# Altium PCB circuit.PcbDoc
Units mil, origin at the board's own origin, x right, y up, seen from the top; angles counter-clockwise.
Board outline 5474.5 x 3359.91 mil, 2 copper layers (Top Layer, Top, Bottom Layer, Bottom); 18 components, 16 nets, 65 pads, 1 vias.
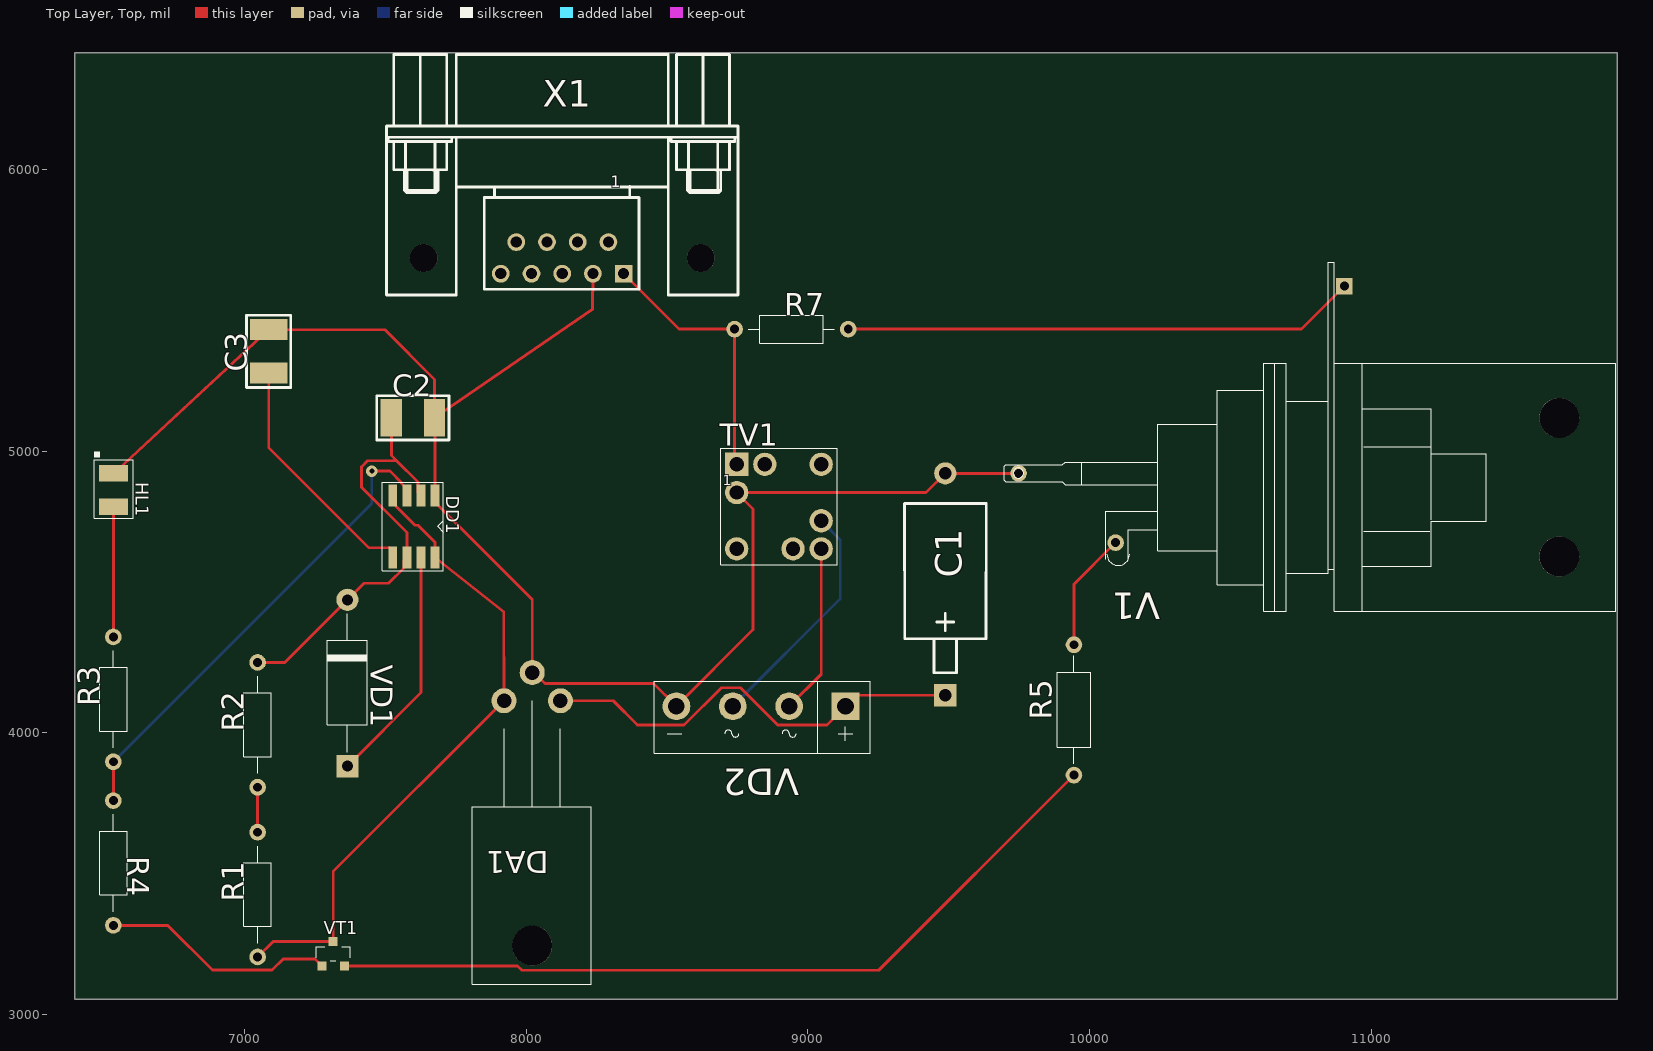
[diagram p0: Top Layer, Top view]
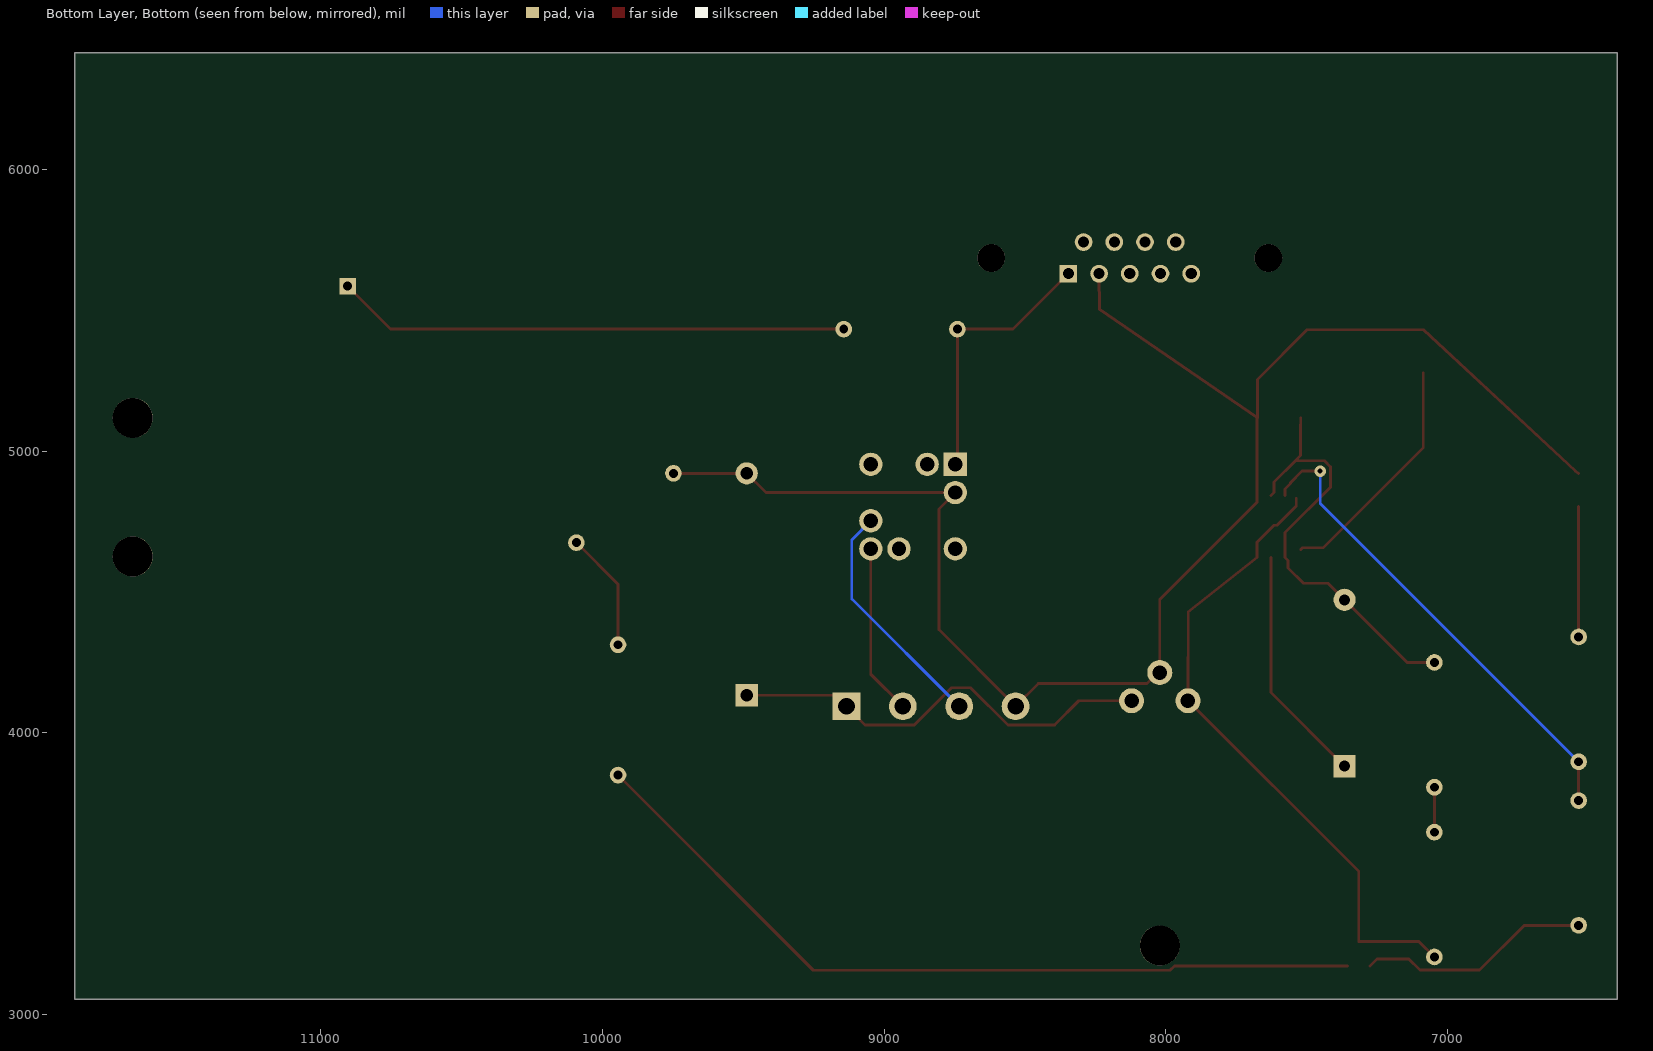
[diagram p1: Bottom Layer, Bottom view, seen from below]

## Layer stack, top to bottom
Top Solder, Top Mask: solder mask 0.4, Solder Resist, Dk 3.5
Top Layer, Top: signal copper 1.4
Dielectric 1: dielectric 12.6, FR-4, Dk 4.8
Bottom Layer, Bottom: signal copper 1.4
Bottom Solder, Bot Mask: solder mask 0.4, Solder Resist, Dk 3.5

## Board outline
6398.45,3054.06 11872.95,3054.06 11872.95,6413.96 6398.45,6413.96

## Design rules (kind name [scope] priority, off if disabled: settings)
Clearance [All] p1: gap=10 ignorepadtopadclearanceinfootprint=FALSE except(0: Arc-Hole Track-Hole SMDPad-Hole THPad-Hole Via-Hole Fill-Hole Poly-Hole Region-Hole Text-Hole; 11.81: Arc-Arc Arc-Track Arc-THPad Arc-Via Track-Track Track-THPad Track-Via THPad-THPad THPad-Via Via-Via)
PlaneClearance [All] p1: clearance=10
PolygonConnect [All] p1: connectstyle=Relief reliefconductorwidth=10 reliefentries=4 polygonreliefangle="90 Angle" airgapwidth=10
RoutingVias [All] p1: holewidth=28 width=50 viastyle="Through Hole" minholewidth=28 minwidth=50 maxholewidth=28 maxwidth=50
SolderMaskExpansion [All] p1: expansion=4 istentingtop=FALSE
Width [All] p1: maxlimit=10 minlimit=10 preferedwidth=10
29 further rules are at their usual default settings.

## Components (designator, comment, footprint, x,y, rotation, side; value= is the part's Value field where it differs from the comment)
C1 "" K534A-4 9488.19,4133.86 r90 top
C2 "" CC1812 7598.43,5118.11 r0 top
C3 "" CC1812 7086.61,5354.33 r90 top
DA1 "" TO-220-KT-28-2_КР142ЕН5А(Primary) 8122.05,4114.17 r180 top
DD1 "" SO-8 7677.17,4842.52 r270 top
HL1 "{Value}" 3528_3528(Primary) 6535.43,4921.26 r270 top
R1 "" C2-33H-0.125W 7047.24,3204.72 r90 top
R2 "" C2-33H-0.125W 7047.24,3807.09 r90 top
R3 "" C2-33H-0.125W 6535.43,3897.64 r90 top
R4 "" C2-33H-0.125W 6535.43,3759.84 r270 top
R5 "" C2-33H-0.25W 9944.88,3850.39 r90 top
R7 "" C2-33H-0.125W_10MM 8740.16,5433.07 r0 top
TV1 "" TRS-3-1 8897.64,4803.15 r0 top
V1 "" TC122_TC122(Primary) 9748.03,4921.26 r180 top
VD1 "" DO-7_1N34(Primary) 7366.14,4177.17 r270 top
VD2 "" RS-4L 9133.86,4094.49 r180 top
VT1 "" SOT-23_2N5551S(Primary) 7275.59,3173.23 r0 top
X1 "" CAN9V 8346.46,5629.92 r0 top

## Footprints (in the part's own frame and the unit in brackets; to place one, negate y for a bottom-side part, rotate by r counter-clockwise, add the part's x,y. Pads: shape width x height; smd on the part's side, far side on the other; paste and mask are expansions set on the pad)
3528_3528(Primary) [mm]
  rect 1.5x2.6 smd: A(3,0) K(0,0)
  silkscreen extent -1.96,-1.71 4.04,1.79
C2-33H-0.25W [mm]
  round 1.5 hole 0.8: 1(0,0) 2(11.75,0)
  silkscreen extent 1,-1.5 10.75,1.5
C2-33H-0.125W [mm]
  round 1.5 hole 0.8: 1(0,0) 2(11.25,0)
  silkscreen extent 1.25,-1.25 10,1.25
C2-33H-0.125W_10MM [mm]
  round 1.5 hole 0.8: 1(0,0) 2(10.25,0)
  silkscreen extent 1.25,-1.25 9,1.25
CAN9V [mm]
  rect 1.6x1.6 hole 1: 1(0,0)
  round 1.6 hole 1: 2(-2.769,0) 3(-5.537,0) 4(-8.306,0) 5(-11.074,0) 6(-1.372,2.845) 7(-4.14,2.845) 8(-6.909,2.845) 9(-9.677,2.845)
  round 2.5 hole 2.5: 10(-18.034,1.422) 11(6.96,1.422)
  silkscreen extent -21.38,-1.93 10.31,19.79
CC1812 [mm]
  rect 1.9x3.4 smd: 1(-1.95,0) 2(1.95,0)
  silkscreen extent -3.25,-2 3.25,2
DO-7_1N34(Primary) [mm]
  rect 2x2 hole 1: A(7.5,0)
  round 2 hole 1: K(-7.5,0)
  silkscreen extent -6.25,-1.8 6.25,1.8
K534A-4 [mm]
  rect 2x2 hole 1.1: 1(0,0)
  round 2 hole 1.1: 2(20,0)
  silkscreen extent 2.03,-3.68 17.27,3.68
RS-4L [mm]
  rect 2.5x2.5 hole 1.5: 1(0,0)
  round 2.5 hole 1.5: 2(5.08,0) 3(10.16,0) 4(15.24,0)
  silkscreen extent -2.25,-2.25 17.25,4.25
SO-8 [mm]
  rect 2x0.8 smd: 1(0,0) 2(0,-1.27) 3(0,-2.54) 4(0,-3.81) 5(5.588,-3.81) 6(5.588,-2.54) 7(5.588,-1.27) 8(5.588,0)
  silkscreen extent -1.21,-4.75 6.79,0.75
SOT-23_2N5551S(Primary) [mm]
  rect 0.8x0.8 smd: 1(2.032,0) 2(0,0) 3(1.016,2.21)
  silkscreen extent -0.51,0.46 2.54,1.73
TC122_TC122(Primary) [mm]
  round 1.5 hole 0.8: 1(0,0) UE(-8.75,6.25)
  rect 1.5x1.5 hole 0.8: 2(-29.375,-16.875)
  round 3.6 hole 3.6 unplated: 4(-48.75,7.5) 5(-48.75,-5)
  silkscreen extent -53.85,-19.05 1.27,12.45
TO-220-KT-28-2_КР142ЕН5А(Primary) [mm]
  round 2.25 hole 1.3: 2(5.08,0) 8(2.54,-2.54) 17(0,0)
  round 3.6 hole 3.6 unplated: 4(2.55,22.07)
  silkscreen extent -2.8,0 7.95,25.57
TRS-3-1 [mm]
  rect 2.1x2.1 hole 1.3: 1(-3.81,3.81)
  round 2.1 hole 1.3: 2(-3.81,1.27) 3(1.27,-3.81) 4(3.81,-3.81) 5(3.81,-1.27) 6(-1.27,3.81) 7(3.81,3.81) 8(-3.81,-3.81)
  silkscreen extent -5.25,-5.25 5.25,5.25

## Via types
v1: diameter 40, hole 18, Top Layer, Top to Bottom Layer, Bottom, 1 vias

## Nets (pads, with @x,y where several pads share a name; then routed paths per layer and width w, separated by ;. In a path a pad name is that pad's centre, name@x,y a point inside that pad or via, vN(x,y) a via of type N, cw(c..) or ccw(c..) an arc to the next point about the centre after c; other vN are vias at no path point)
NET00001: R7.2 V1.2 | length 1824
  Top Layer, Top w10: R7.2 10751.97,5433.07 V1.2
NET00003: R7.1 TV1.1 X1.1 | length 958.3
  Top Layer, Top w10: X1.1 8543.31,5433.07 R7.1 8740.16,4960.63 TV1.1
NET00004: TV1.4 VD2.2 | length 605.8
  Top Layer, Top w10: VD2.2 9047.64,4208.27 TV1.4
NET00006: C1.1 DA1.17 VD2.1 | length 1553.6
  Top Layer, Top w10: DA1.17 8309.4,4114.17 8395.11,4028.46 8561.21,4028.46 8693.25,4160.51 8761.21,4160.51 8893.25,4028.46 9067.83,4028.46 VD2.1 9177.17,4133.86 C1.1
NET00008: R1.2 R2.1 | length 159.4
  Top Layer, Top w10: R1.2 R2.1
NET00009: C3.1 DD1.5 | length 849.2
  Top Layer, Top w10: C3.1 7086.61,5013.39 7443.11,4656.89 7516.42,4656.89 DD1.5@7521.79,4651.52
NET00010: DD1.3 R3.1 R4.1 | length 1725
  Top Layer, Top w10: R4.1 R3.1 ; v1(7452.76,4929.13) 7516.88,4929.13 7557.91,4888.1 7557.91,4885.39 7577.17,4866.14 DD1.3
  Bottom Layer, Bottom w10: R3.1 7452.76,4814.96 v1(7452.76,4929.13)
NET00011: HL1.A R3.2 | length 464.6
  Top Layer, Top w10: R3.2@6535.43,4338.58 R3.2 HL1.A
NET00012: R4.2 VT1.2 | length 832.6
  Top Layer, Top w10: R4.2 6728.3,3316.93 6886.84,3158.39 7098.68,3158.39 7138.41,3198.12 7250.7,3198.12 VT1.2
NET00013: R5.1 VT1.1 | length 2882.7
  Top Layer, Top w10: VT1.1 7969.71,3173.23 7985.34,3157.6 9252.09,3157.6 R5.1
NET00014: R5.2 V1.UE | length 423.4
  Top Layer, Top w10: R5.2 9944.88,4527.56 V1.UE
NET00015: DA1.2 DD1.4 DD1.8 R1.1 VT1.3 | length 2296.1
  Top Layer, Top w10: R1.1 7102.75,3260.23 VT1.3 7315.59,3507.72 DA1.2 7921.26,4429.13 DD1.8 7677.17,4676.89 7617.14,4736.91 7606.44,4736.91 7537.91,4805.44 DD1.4@7537.91,4831.77
NET00018: TV1.5 VD2.3 | length 844.4
  Bottom Layer, Bottom w10: VD2.3 9115,4475.63 9115,4685.79 TV1.5
NET00019: DD1.7 VD1.A | length 848.7
  Top Layer, Top w10: VD1.A 7627.17,4142.91 DD1.7
NET00021: C2.1 DD1.2 DD1.6 R2.2 VD1.K | length 1540.8
  Top Layer, Top w10: R2.2 7143.7,4250 VD1.K 7424.97,4531.27 7512.24,4531.27 7566.42,4585.44 7566.42,4611.77 DD1.6 7577.17,4710.89 7415.94,4872.11 7415.94,4944.38 7437.51,4965.94 7540.55,4965.94 ; C2.1 7522.42,5074.95 7522.42,4984.07 7540.55,4965.94 ; DD1.2 7616.42,4853.27 7616.42,4890.08 7540.55,4965.94
NET00023: C1.2 C2.2 C3.2 DA1.8 DD1.1 HL1.K TV1.2 V1.1 VD2.4 X1.2 | length 5889.2
  Top Layer, Top w10: HL1.K 6547.24,4929.13 C3.2 7498.9,5431.1 7675.2,5254.8 C2.2 ; X1.2 8236.22,5503.94 C2.2 ; V1.1 C1.2 9420.08,4853.15 TV1.2 8805.79,4795 8805.79,4366.42 VD2.4 8453.07,4175.28 8067,4175.28 8028.1,4214.17 DA1.8 8022.05,4474.02 7677.17,4818.9 DD1.1 7677.17,5116.14 C2.2
pads on no net: DA1.4 TV1.3 TV1.6 TV1.7 TV1.8 V1.4 V1.5 X1.3 X1.4 X1.5 X1.6 X1.7 X1.8 X1.9 X1.10 X1.11

## Text inside footprints (layer, text, board x,y; h text height)
TV1: Top Overlay, Top Silk "1" at 8697.64,4878.15 h36.91
X1: Top Overlay, Top Silk "1" at 8301.34,5936.84 h40; Mechanical 1, Top Assy "1" at 8301.34,5936.84 h40